# Altium PCB JacdacServoDual 23.PcbDoc (part 1 of 2)
Units mm, origin at the board's own origin, x right, y up, seen from the top; angles counter-clockwise.
Board outline 35 x 26.5 mm, 2 copper layers (Top Layer, Bottom Layer), stack 1.525 mm thick; 38 components, 30 nets, 124 pads, 24 vias.
Unrouted connection lines stored in the file: 10.
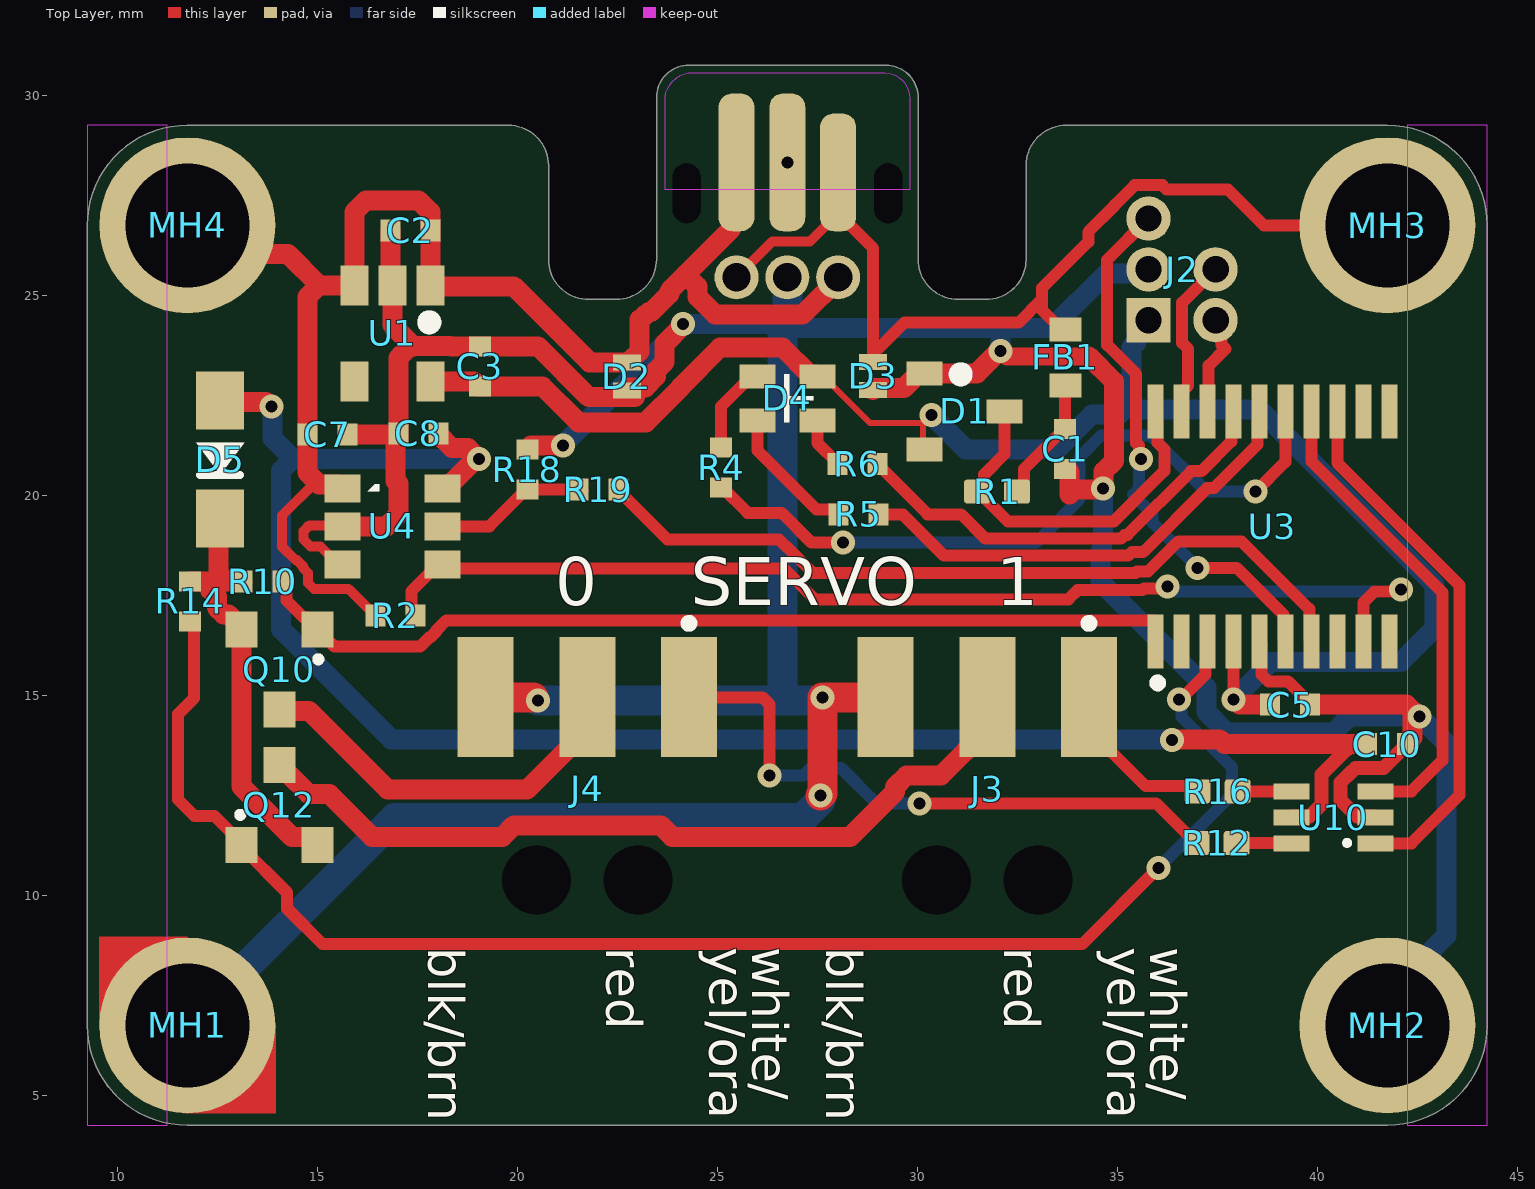
[diagram p0: Top Layer view]
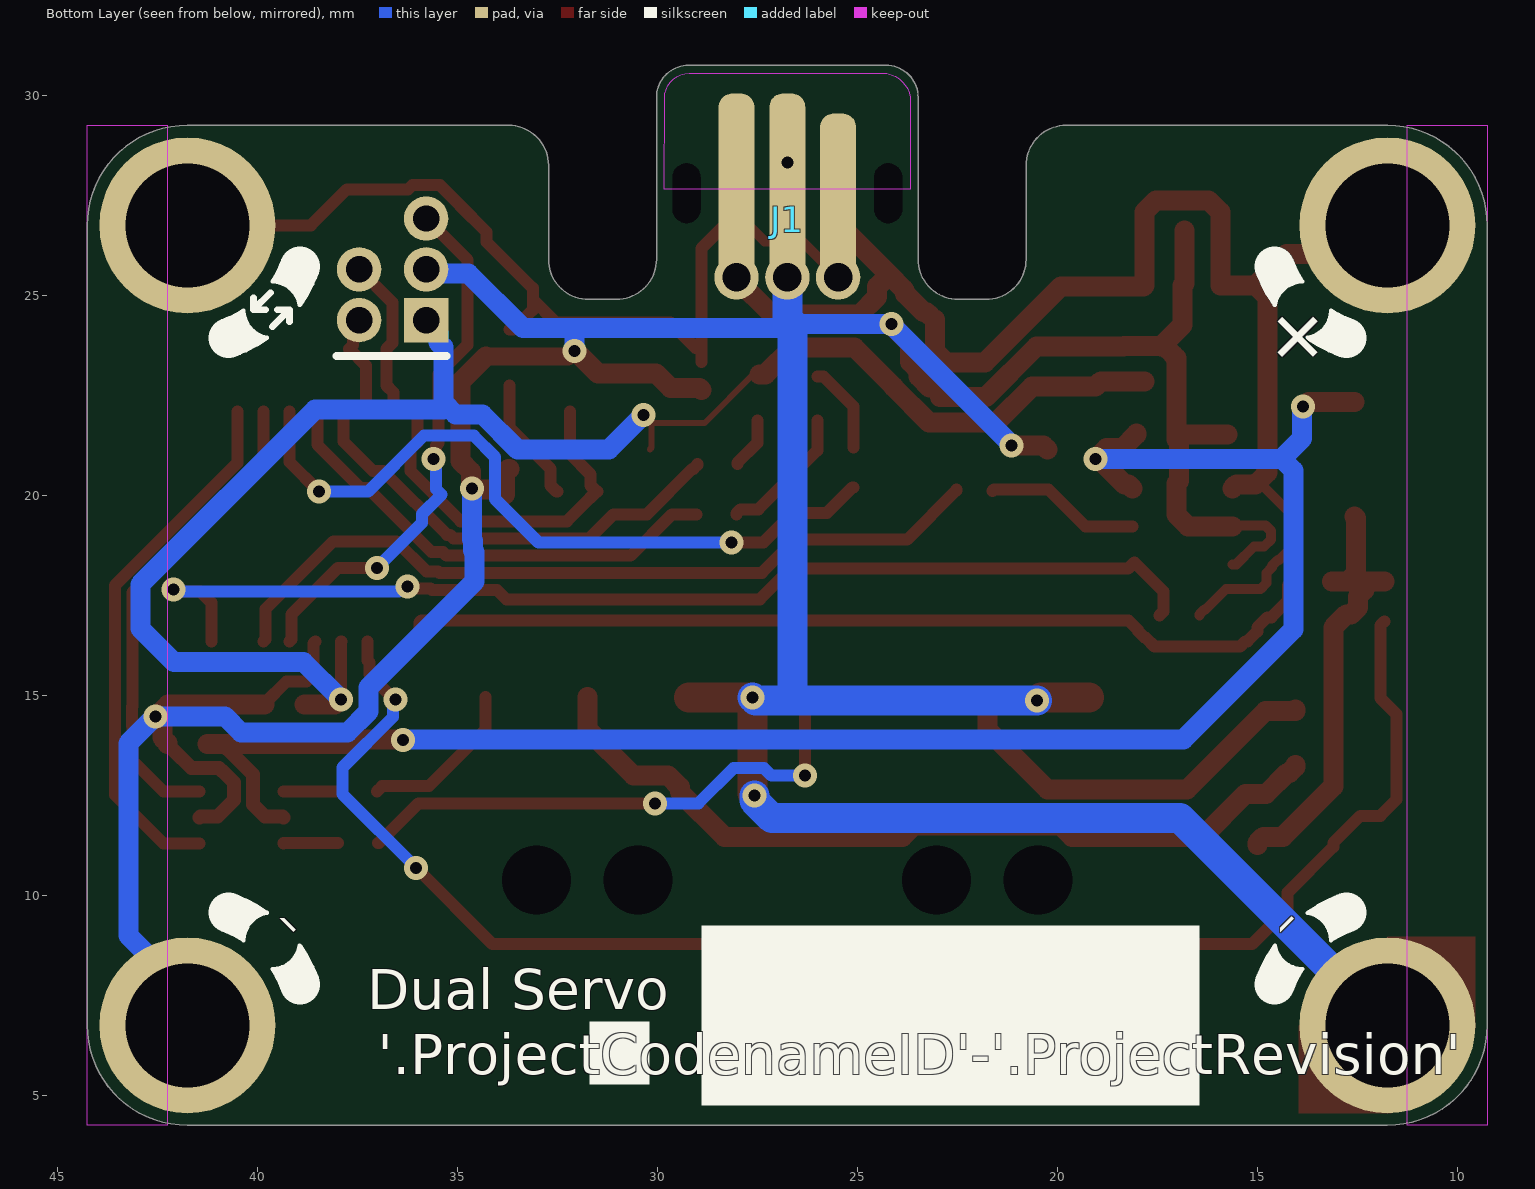
[diagram p1: Bottom Layer view, seen from below]

## Layer stack, top to bottom
Top Solder: solder mask 0.0102, Solder Resist, Dk 3.5
Top Layer: signal copper 0.0356
Dielectric 1: core 1.454, FR-4, Dk 4.2
Bottom Layer: signal copper 0.0356
Bottom Solder: solder mask 0.0102, Solder Resist, Dk 3.5

## Board outline
9.25,6.75 ccw(c11.75,6.75) 11.75,4.25 41.75,4.25 ccw(c41.75,6.75) 44.25,6.75 44.25,26.75 ccw(c41.75,26.75) 41.75,29.25 41.744,29.25 33.72,29.25 ccw(c33.72,28.25) 32.72,28.25 32.72,25.898 cw(c31.72,25.898) 31.72,24.898 31.72,24.9 31.02,24.9 cw(c31.02,25.9) 30.02,25.9 30.02,29.95 ccw(c29.22,29.95) 29.22,30.75 24.28,30.75 ccw(c24.28,29.95) 23.48,29.95 23.48,29.948 23.48,25.898 23.48,25.9 cw(c22.48,25.9) 22.48,24.9 22.51,24.9 21.78,24.9 21.78,24.898 cw(c21.78,25.898) 20.78,25.898 20.78,28.25 ccw(c19.78,28.25) 19.78,29.25 11.744,29.25 11.75,29.25 ccw(c11.75,26.75) 9.25,26.75

## Design rules (kind name [scope] priority, off if disabled: settings)
AssemblyTestPointUsage [All] p1: valid=2
BoardOutlineClearance [All] p1: gap=0.3 ignorepadtopadclearanceinfootprint=FALSE except(0: Arc-SplitContinuation Track-SplitContinuation SMDPad-SplitContinuation THPad-SplitContinuation Via-SplitContinuation Fill-SplitContinuation Poly-SplitContinuation Region-SplitContinuation Text-OutlineEdge Text-SplitContinuation; 0.2: Region-CavityEdge Region-CutoutEdge Region-SplitBarrior Text-CavityEdge Text-CutoutEdge Text-SplitBarrior)
Clearance [All] p1: gap=0.13 ignorepadtopadclearanceinfootprint=FALSE except(0.125: SMDPad-SMDPad; 0.254: Arc-Hole Track-Hole SMDPad-Hole THPad-Hole Via-Hole Fill-Hole Poly-Hole Region-Hole Text-Hole)
ComponentClearance MH5.0KeepoutaAreaClearance [InComponent('MH1') or InComponent('MH2')  or InComponent('MH3') or InComponent('MH4') vs InComponent('D6') or InComponent('D7') or InComponent('D8') or InComponent('D9') or InComponent('D10') or InComponent('D11') or InComponent('D12') or InComponent('D13') or InComponent('C6') or InComponent('C7') or InComponent('C8')  or  InComponent('C9') or  InComponent('C12')] p1: gap=0 collisioncheckmode=3 verticalgap=0 showdistances=FALSE
ComponentClearance [All] p2: gap=0.2 collisioncheckmode=3 verticalgap=0.2 showdistances=FALSE
DiffPairsRouting [All] p1: maxlimit=2 minlimit=0.15 mostfreqgap=0.15 toplayer_minwidth=0.15 toplayer_maxwidth=2 toplayer_prefwidth=0.15 bottomlayer_minwidth=0.15 bottomlayer_maxwidth=2 bottomlayer_prefwidth=0.15 substack1={CB9D278B-8BF5-444A-AAF4-837A2A9DF42D} toplayer_{cb9d278b-8bf5-444a-aaf4-837a2a9df42d}_minwidth=0.381 toplayer_{cb9d278b-8bf5-444a-aaf4-837a2a9df42d}_maxwidth=0.381 toplayer_{cb9d278b-8bf5-444a-aaf4-837a2a9df42d}_prefwidth=0.381 bottomlayer_{cb9d278b-8bf5-444a-aaf4-837a2a9df42d}_minwidth=0.381 bottomlayer_{cb9d278b-8bf5-444a-aaf4-837a2a9df42d}_maxwidth=0.381 bottomlayer_{cb9d278b-8bf5-444a-aaf4-837a2a9df42d}_prefwidth=0.381 substack2={826B8647-A721-4255-895A-19F9591B9CD1} toplayer_{826b8647-a721-4255-895a-19f9591b9cd1}_minwidth=0.381 toplayer_{826b8647-a721-4255-895a-19f9591b9cd1}_maxwidth=0.381 toplayer_{826b8647-a721-4255-895a-19f9591b9cd1}_prefwidth=0.381 bottomlayer_{826b8647-a721-4255-895a-19f9591b9cd1}_minwidth=0.381 bottomlayer_{826b8647-a721-4255-895a-19f9591b9cd1}_maxwidth=0.381 bottomlayer_{826b8647-a721-4255-895a-19f9591b9cd1}_prefwidth=0.381 substack3={E64FCAF4-1BC8-437D-B1E0-0E5F2DC0F59E} toplayer_{e64fcaf4-1bc8-437d-b1e0-0e5f2dc0f59e}_minwidth=0.381 toplayer_{e64fcaf4-1bc8-437d-b1e0-0e5f2dc0f59e}_maxwidth=0.381 toplayer_{e64fcaf4-1bc8-437d-b1e0-0e5f2dc0f59e}_prefwidth=0.381 bottomlayer_{e64fcaf4-1bc8-437d-b1e0-0e5f2dc0f59e}_minwidth=0.381 bottomlayer_{e64fcaf4-1bc8-437d-b1e0-0e5f2dc0f59e}_maxwidth=0.381 bottomlayer_{e64fcaf4-1bc8-437d-b1e0-0e5f2dc0f59e}_prefwidth=0.381 substack4={E61CE66C-507C-4E1E-8E83-C905434AFC1C} toplayer_{e61ce66c-507c-4e1e-8e83-c905434afc1c}_minwidth=0.381 toplayer_{e61ce66c-507c-4e1e-8e83-c905434afc1c}_maxwidth=0.381 toplayer_{e61ce66c-507c-4e1e-8e83-c905434afc1c}_prefwidth=0.381 bottomlayer_{e61ce66c-507c-4e1e-8e83-c905434afc1c}_minwidth=0.381 bottomlayer_{e61ce66c-507c-4e1e-8e83-c905434afc1c}_maxwidth=0.381 bottomlayer_{e61ce66c-507c-4e1e-8e83-c905434afc1c}_prefwidth=0.381 maxuncoupledlength=25
FabricationTestPointUsage [All] p1: valid=2 allowmultiple=FALSE
HoleSize [All] p1: absolutevalues=TRUE maxlimit=5 minlimit=0.2 maxpercent=80.000 minpercent=20.000
HoleToHoleClearance HoleToHoleClearance_J3_J4 [InComponent('J3') vs InComponent('J4')] p1: gap=2.54 allowstackedmicrovias=TRUE
HoleToHoleClearance [All] p2: gap=0.254 allowstackedmicrovias=TRUE
MinimumSolderMaskSliver [All] p1: minsoldermaskwidth=0.005
PlaneClearance [All] p1: clearance=0.3
PlaneConnect [All] p1: planeconnectstyle=Relief reliefexpansion=0.5 reliefentries=4 reliefconductorwidth=0.2 reliefairgap=0.3
PolygonConnect "PolygonConnect GND" [isVIA] p1: connectstyle=Relief reliefconductorwidth=0.2 reliefentries=4 polygonreliefangle="90 Angle" airgapwidth=0.2
PolygonConnect [All] p2: connectstyle=Relief reliefconductorwidth=0.2 reliefentries=4 polygonreliefangle="90 Angle" airgapwidth=0.2
RoutingVias [All] p1: holewidth=0.3 width=0.6 viastyle="Through Hole" minholewidth=0.3 minwidth=0.6 maxholewidth=0.3 maxwidth=0.8
SilkToSilkClearance [All] p1: silktosilkclearance=0.001
SilkToSolderMaskClearance [IsPad] p1: minsilkscreentomaskgap=0.05 clearancetoexposedcopper=TRUE
SolderMaskExpansion [All] p1: expansion=0.075 istentingtop=FALSE
UnRoutedNet [All] p1: checkbadconnections=TRUE
ViasUnderSMD [not (HasFootprint('JACDAC_EDGE_CONNECTOR_NO_TRACES'))] p1: allowed=FALSE
Width [All] p1: maxlimit=2 minlimit=0.15 preferedwidth=0.15 substack1={CB9D278B-8BF5-444A-AAF4-837A2A9DF42D} substack2={826B8647-A721-4255-895A-19F9591B9CD1} substack3={E64FCAF4-1BC8-437D-B1E0-0E5F2DC0F59E} substack4={E61CE66C-507C-4E1E-8E83-C905434AFC1C} minimp=50.000000 maximp=50.000000 favimp=50.000000
18 further rules are at their usual default settings.

## Components (designator, comment, footprint, x,y, rotation, side; value= is the part's Value field where it differs from the comment)
C1 "CL05C330JB5NNNC" "C0402_0.55MM - without outline" 33.695,21.163 r90 top
C2 "CL05A105KP5NNNC" "C0402_0.55MM - without outline" 17.325,26.625 r0 top
C3 "CL05A105KP5NNNC" "C0402_0.55MM - without outline" 19.065,23.222 r270 top
C5 "CL05A105KP5NNNC" "C0402_0.55MM - without outline" 39.322,14.769 r180 top
C7 "CL05A475MP5NRNC" "R0402 - Without outline" 15.25,21.525 r180 top
C8 "CL05A475MP5NRNC" "R0402 - Without outline" 17.525,21.55 r0 top
C10 "CL05A105KP5NNNC" "C0402_0.55MM - without outline" 41.744,13.782 r180 top
D1 "BAT54S" "NXP-BAT54S-TO-236AB - without outline" 31.185,22.1 r0 top
D2 "RCLAMP0521P-N" "TVS 0402 - L" 22.736,22.977 r270 top
D3 "RCLAMP0521P-N" "TVS 0402 - L" 28.894,22.986 r270 top
D4 "HSMF-C114" HSMF-C114 26.75,22.425 r180 top
D5 "MBR120VLSFT3G" MBR120VLSFT3G 12.57,20.895 r90 top
FB1 "TDK MPZ1608S102ATA00" "TDK MPZ1608 0.8mm - without outline" 33.7,23.45 r270 top
J1 "3 pin JACDAC edge connector" JACDAC_EDGE_CONNECTOR_NO_TRACES 26.75,24.9 r180 bottom
J2 "Hack Connect Mini 1.27 mm pitch 2-row" HACK_CONNECT_MINI_5_X_1_27 35.779,24.38 r0 top
J3 "TSM-103-01-L-SH-A" TSM-103-01-L-SH-A 31.75,12.666 r0 top
J4 "TSM-103-01-L-SH-A" TSM-103-01-L-SH-A 21.75,12.666 r0 top
MH1 "MH_7.0MMK_4.4MMC_3.1MMD_PTH" MH_7.0MMK_4.4MMC_3.1MMD_PTH 11.75,6.75 r0 top
MH2 "MH_7.0MMK_4.4MMC_3.1MMD_PTH" MH_7.0MMK_4.4MMC_3.1MMD_PTH 41.75,6.75 r0 top
MH3 "MH_7.0MMK_4.4MMC_3.1MMD_PTH" MH_7.0MMK_4.4MMC_3.1MMD_PTH 41.75,26.75 r0 top
MH4 "MH_7.0MMK_4.4MMC_3.1MMD_PTH" MH_7.0MMK_4.4MMC_3.1MMD_PTH 11.75,26.75 r0 top
Q10 "MOSFET P-CH 20V 4.2A SOT23" DIODES-SOT23-3 14.05,15.65 r270 top
Q12 "MOSFET P-CH 20V 4.2A SOT23" DIODES-SOT23-3 14.05,12.264 r90 top
R1 "RC0402FR-07220RL" RES0402 31.995,20.095 r0 top
R2 "RC0402FR-071ML" "R0402 - Without outline" 16.95,16.997 r0 top
R4 "RC0402FR-0730RL" "R0402 - Without outline" 25.097,20.694 r270 top
R5 "RC0402FR-0730RL" "R0402 - Without outline" 28.526,19.525 r0 top
R6 "RC0402FR-07150RL" "R0402 - Without outline" 28.499,20.785 r0 top
R10 "RC0402FR-071ML" "R0402 - Without outline" 13.632,17.85 r180 top
R12 "RC0402FR-071KL" RES0402 37.484,11.311 r180 top
R14 "RC0402FR-071ML" "R0402 - Without outline" 11.823,17.35 r90 top
R16 "RC0402FR-071KL" RES0402 37.51,12.6 r180 top
R18 "RC0402FR-0762KL" "R0402 - Without outline" 20.25,20.65 r270 top
R19 "RC0402FR-0762KL" "R0402 - Without outline" 22.025,20.15 r180 top
U1 "ME6211C33M5G-N" MICRONE-SOT23-5 16.875,24.05 r270 top
U3 "" 20-TSSOP 38.875,19.225 r90 top
U4 "AP22652W6-7" SOT-26 16.875,19.225 r0 top
U10 "74HCT2G17GW,125" 6TSSOP_SOT457 40.4,11.95 r180 top

## Footprints (in the part's own frame and the unit in brackets; to place one, negate y for a bottom-side part, rotate by r counter-clockwise, add the part's x,y. Pads: shape width x height; smd on the part's side, far side on the other; paste and mask are expansions set on the pad)
6TSSOP_SOT457 [mm] "IC BUF NON-INVERT 5.5V 6TSSOP"
  rect 0.9x0.4 smd: 1(-1.05,0.65) 2(-1.05,0) 3(-1.05,-0.65) 4(1.05,-0.65) 5(1.05,0) 6(1.05,0.65)
  silkscreen extent -0.39,0.59 -0.29,0.69, body extent -1.05,-1 1.05,1, height 1.1
20-TSSOP [mm] "0.173\", 4.40mm Width"
  rect 1.35x0.4 smd: 1(-2.875,2.925) 2(-2.875,2.275) 3(-2.875,1.625) 4(-2.875,0.975) 5(-2.875,0.325) 6(-2.875,-0.325) 7(-2.875,-0.975) 8(-2.875,-1.625) 9(-2.875,-2.275) 10(-2.875,-2.925) 11(2.875,-2.925) 12(2.875,-2.275) 13(2.875,-1.625) 14(2.875,-0.975) 15(2.875,-0.325) 16(2.875,0.325) 17(2.875,0.975) 18(2.875,1.625) 19(2.875,2.275) 20(2.875,2.925)
  silkscreen extent -4,2.78 -3.83,2.95, body extent -3.3,-3.3 3.3,3.3, height 1.2
"C0402_0.55MM - without outline" [mm]
  rect 0.5x0.55 smd: 1(-0.5,0) 2(0.5,0)
  body extent -0.5,-0.25 0.5,0.25, height 0.55
DIODES-SOT23-3 [mm] "SOT23, 3-Leads, Body 2.90x2.45mm, Pitch 0.95mm, IPC Medium Density"
  rect 0.9x0.8 smd: 1(-1,0.95) 2(-1,-0.95) 3(1,0)
  silkscreen extent -0.3,0.93 -0.2,1.02, body extent -1.27,-1.5 1.23,1.5, height 1.1
HACK_CONNECT_MINI_5_X_1_27 [mm] "5 pins, 1.27mm x 1.676mm pitch"
  rect 1.11x1.11 hole 0.66: 1(0,0)
  round 1.11 hole 0.66: 2(1.676,0) 3(0,1.27) 4(1.676,1.27) 5(0,2.54)
HSMF-C114 [mm] "LED RGB DIFFUSED CHIP SMD"
  rect 0.9x0.6 smd mask+0.05: 1(-0.75,-0.55) 2(-0.75,0.55) 3(0.75,0.55) 4(0.75,-0.55)
  silkscreen extent -0.65,-0.6 0.07,0.6, body extent -0.8,-0.75 0.8,0.75, height 0.55
JACDAC_EDGE_CONNECTOR_NO_TRACES [mm] "JacDac 3 pin connector with no traces"
  rrect78% 0.9x2.95 smd far side paste-1 mask+0: 1(-1.27,3.175)
  round 1.11 / inner round 0.71 / far side round 1.1 hole 0.71 paste-0.254 mask+0: 1(1.27,0.55) 2(0,0.55) 3(-1.27,0.55)
  rrect78% 0.9x4.3 smd paste-1 mask+0: 1(1.27,2.5)
  rrect78% 0.9x4.8 smd paste-1 mask+0: 2(0,2.75) 3(-1.27,2.75)
  rrect78% 0.9x3.45 smd far side paste-1 mask+0: 2(0,3.425) 3(1.27,3.425)
  round 0 hole 0.7 slot 1.5 at 90 deg unplated: ""(-2.52,2.65) ""(2.52,2.65)
  Top Layer keep-out region: -3.075,2.75 -3.07,5.033 -2.987,5.341 -2.761,5.567 -2.453,5.65 -2.453,5.65 2.27,5.65 2.545,5.635 2.794,5.516 2.978,5.31 3.07,5.05 3.07,5.05 3.07,2.75
  Bottom Layer keep-out region: -3.07,2.75 -3.07,5.033 -3.023,5.269 -2.889,5.469 -2.689,5.603 -2.453,5.65 -2.453,5.65 2.27,5.65 2.545,5.635 2.794,5.516 2.978,5.31 3.07,5.05 3.07,5.05 3.07,2.75
MBR120VLSFT3G [mm] "SODFL, 2-Leads, Body 1.65x3.60mm, IPC Medium Density"
  rect 1.45x1.2 smd: 1(-1.475,0) 2(1.475,0)
  silkscreen extent -0.38,-0.6 0.42,0.6, body extent -1.73,-0.82 1.72,0.82, height 0.95
MH_7.0MMK_4.4MMC_3.1MMD_PTH [mm] "Jacdac mounting hole 7.0mm clearance, 4.4 annualar ring and 3.1mm PTH"
  round 4.4 hole 3.1 mask+0.05: 1(0,0)
MICRONE-SOT23-5 [mm]
  rect 1x0.7 smd: 1(-1.2,0.95) 2(-1.2,0) 3(-1.2,-0.95) 4(1.2,-0.95) 5(1.2,0.95)
  silkscreen extent -0.32,0.88 -0.23,0.97, body extent -1.32,-1.5 1.32,1.5, height 1.11
"NXP-BAT54S-TO-236AB - without outline" [mm] "SOT23, 3-Leads, Body 2.90x2.30mm, Pitch 0.95mm, IPC Medium Density"
  rect 0.9x0.6 smd: 1(-1,0.95) 2(-1,-0.95) 3(1,0)
  silkscreen extent -0.15,0.88 -0.05,0.97, body extent -1.32,-1.5 1.32,1.5, height 1.12
"R0402 - Without outline" [mm]
  rect 0.5x0.55 smd: 1(-0.5,0) 2(0.5,0)
  body extent -0.5,-0.25 0.5,0.25, height 0.35
RES0402 [mm] "Chip Resistor 0402"
  rrect25% 0.65x0.6 smd: 1(-0.5,0) 2(0.5,0)
  body extent -0.53,-0.28 0.53,0.27, height 0.35
SOT-26 [mm] "LOAD SWITCH SOT26"
  rrect0% 0.9x0.7 smd mask+0.05: 1(-1.25,0.95) 2(-1.25,0) 3(-1.25,-0.95) 4(1.25,-0.95) 5(1.25,0) 6(1.25,0.95)
  silkscreen extent -0.62,0.87 -0.33,1.05, body extent -1.52,-1.52 1.53,1.53, height 1.1
"TDK MPZ1608 0.8mm - without outline" [mm]
  rect 0.6x0.8 smd: 1(-0.7,0) 2(0.7,0)
  body extent -0.8,-0.4 0.8,0.4, height 0.8
TSM-103-01-L-SH-A [mil]
  rect 55.12x118.11 smd: 1(100,90) 2(0,90) 3(-100,90)
  round 60 hole 68.11: 5(50,-90) 6(-50,-90)
  silkscreen extent 96,159 104,167, body extent -150,-370 150,140, height 120
"TVS 0402 - L" [mm] "TVS 0402 RoHS"
  rect 0.4x0.7 smd paste-0.038 mask+0.05: 1(-0.35,0) 2(0.35,0)
  body extent -0.5,-0.3 0.5,0.3, height 0.5

## Part data
C1: "CAP CER 33PF 50V C0G/NP0 0402", Capacitance=33pF, Case Code (Imperial)=0402, Case Code (Metric)=1005, Dielectric=C0G, Manufacturer=Samsung, Max Operating Temperature=125°C, Min Operating Temperature=-55°C, Package Quantity=1, Supplier Part Number 1=1276-1272-1-ND, Temperature Coefficient=300ppm/°C, Tolerance=5%, Voltage=50V, Case/Package=0402, Category="Ceramic Capacitors", ComponentLink1Description="Online datasheet", ComponentLink1URL=https://datasheet.ciiva.com/15195/getdatasheetpartid-355282-15195687.pdf, Construction=Flat, Contact Plating=Tin, Depth=0.5mm, Height=0.5mm, Lead Free="Lead Free", Length=1mm, Manufacturer Part Number=CL05C330JB5NNNC, Material=Ceramic, Mount="Surface Mount", Packaging="Tape and Reel", Pricing 1="1=0.10000, 10=0.02300, 50=0.01260, 100=0.01040, 500=0.00740, 1000=0.00582, 2500=0.00529, 5000=0.00487 (USD)", Pricing 2="1=0.12500, 25=0.02900, 100=0.01300, 250=0.01100, 500=0.00900, 1000=0.00600 (USD)", Pricing 3="1=0.10000, 10=0.01400, 50=0.01400, 100=0.01100, 1000=0.00600, 10000=0.00400 (USD)", Pricing 4="150=0.01120, 500=0.00860, 2500=0.00640, 5000=0.00550 (GBP)", Radiation Hardening=No, RoHS=Yes, RoHS Compliant=Yes, Series=CL, Stock 1=5436088, Stock 2=45340, Stock 3=8877, Stock 4=10934, Supplier 1=Digi-Key, Supplier 2=Newark, Supplier 3=Mouser, Supplier 4=Farnell, Supplier Part Number 2=82AC9259, Supplier Part Number 3=187-CL05C330JB5NNNC, Supplier Part Number 4=3013373RL, Thickness=0.022inch, Voltage Rating=50V, Voltage Rating (DC)=50V, Width=0.02inch
C2 C3 C5 C10: "CAP CER 1UF 10V X5R 0402", Capacitance=1µF, Case Code (Imperial)=0402, Case Code (Metric)=1005, Dielectric=X5R, Manufacturer=Samsung, Max Operating Temperature=85°C, Min Operating Temperature=-55°C, Package Quantity=1, Supplier Part Number 1=1276-1076-1-ND, Tolerance=10%, Voltage Rating=10V, Case/Package=0402, Category=Capacitors, Checked=?, ComponentLink1Description="Online datasheet", ComponentLink1URL=https://datasheet.ciiva.com/15195/getdatasheetpartid-358390-15195630.pdf, Contact Plating=Tin, Created=DG, Depth=0.5mm, Height=0.5mm, Length=1mm, Manufacturer Part Number=CL05A105KP5NNNC, Material=Ceramic, Mount="Surface Mount", Packaging="Tape and Reel", Pricing 1="1=0.10000, 10=0.03900, 50=0.02100, 100=0.01720, 500=0.01228, 1000=0.00965, 2500=0.00877, 5000=0.00807 (USD)", Pricing 2="1=0.10000, 10=0.04200, 100=0.01800, 500=0.01300, 1000=0.01000, 2500=0.00900 (USD)", Pricing 3="10=0.02450, 100=0.02000, 500=0.01310, 2500=0.00920, 5000=0.00810, 10000=0.00640, 50000=0.00490 (GBP)", Radiation Hardening=No, RoHS=Yes, Stock 1=5705569, Stock 2=928941, Stock 3=53670, Supplier 1=Digi-Key, Supplier 2=Mouser, Supplier 3=Farnell, Supplier Part Number 2=187-CL05A105KP5NNNC, Supplier Part Number 3=3013329, Thickness=0.022inch, Width=0.02inch
C7 C8: "CAP CER 4.7UF 10V X5R 0402", Capacitance=4.7uF, Case Code (Imperial)=0402, Case Code (Metric)=1005, Dielectric=X5R, Manufacturer=Samsung, Max Operating Temperature=85°C, Min Operating Temperature=-55°C, Package Quantity=10000, Supplier Part Number 1=1276-1482-2-ND, Tolerance=20%, Voltage Rating=10V, Case/Package=0402, Category="Ceramic Capacitors", Checked By=?, ComponentLink1Description="Online datasheet", ComponentLink1URL=https://datasheet.ciiva.com/25786/cl05a475mp5nrnc-25786963.pdf, Created By="D. Gakure", Lead Free="Lead Free", Length=0.039inch, Manufacturer Part Number=CL05A475MP5NRNC, Mount="Surface Mount", Packaging="Tape and Reel", Pricing 1="10000=0.01405, 20000=0.01338 (USD)", Pricing 2="1=0.23500, 500=0.03970, 1500=0.02900, 2500=0.02500, 5000=0.02050 (USD)", RoHS=Yes, RoHS Compliant=Yes, Series=CL, Stock 1=840000, Stock 2=2004, Supplier 1=Digi-Key, Supplier 2="Future Electronics", Supplier Part Number 2=2103694, Thickness=0.022inch, Width=0.02inch
D1: "DIODE ARRAY SCHOTTKY 30V SOT23", Manufacturer=Nexperia, Manufacturer Part Number=BAT54S,235, Supplier Part Number 1=1727-1868-1-ND, Category="Rectifier Diodes", ComponentLink1Description="NXP datasheet online", ComponentLink1URL=https://assets.nexperia.com/documents/data-sheet/BAT54_SER.pdf, Generic Part Number=BAT54S, Pricing 1="1=0.13000, 10=0.11900, 100=0.05610, 500=0.03326, 1000=0.02185, 5000=0.02138 (USD)", RoHS=No, Stock 1=14011, Supplier 1=Digi-Key, Supplier 2=Mouser, Supplier 3=RSComponents, Supplier Part Number 2=771-BAT54S235, Supplier Part Number 3=1707990
D2 D3: "Bidirectional 5V (Max) 6V 16V 3.5A (8/20us) 0402 TVS RoHS", Manufacturer="Born Semiconductor", Package=0402, Supplier1 Part Number=C316043, Checked By=?, ComponentLink1Description="Online datasheet", ComponentLink1URL=https://datasheet.lcsc.com/szlcsc/Bourne-Semicon-Shenzhen-RCLAMP0521P-N_C316043.pdf, Created By="D Gakure", Manufacturer Part Number=RCLAMP0521P-N, Supplier1=LCSC
D4: "Red, Green, Blue (RGB) 626nm Red, 525nm Green, 470nm Blue LED Indication - Discrete 1.9V Red, 3.4V Green, 3.4V Blue 0606 (1616 Metric)", Case Code (Imperial)=0606, Case Code (Metric)=1616, Color=Blue,Green,Red, Forward Current=20mA, Forward Voltage=3.4V, Lens Color=White, Manufacturer="Broadcom Avago", Max Operating Temperature=85°C, Min Operating Temperature=-40°C, Package Quantity=4000, Power Rating=78mW, Reverse Voltage=5V, Supplier Part Number 1=516-1795-1-ND, Supplier Part Number 10=?, Case/Package=0606, Category=Optoelectronics, Checked By=?, ComponentLink1Description="Online datasheet", ComponentLink1URL=https://docs.broadcom.com/docs/AV02-2451EN, Created By="D. Gakure", Depth=1.6mm, Dominant Wavelength=470nm, Height=0.35mm, Lead Free="Lead Free", Length=1.6mm, Lens Style=Diffused,Rectangular, Lens Transparency=Diffused, Luminous Intensity=70mcd, Manufacturer Part Number=HSMF-C114, Mount="Surface Mount", Number of Elements=3, Number of LEDs=3, Number of Pins=4, Packaging="Tape and Reel", Pricing 1="1=1.78000, 10=1.12500, 100=0.83250, 500=0.76500, 1000=0.63000, 2000=0.59850 (USD)", Pricing 2="1=1.56000, 10=0.97100, 25=0.87800, 50=0.78500, 100=0.69200, 500=0.60500 (GBP)", Pricing 3="1=1.69000, 10=1.13000, 50=1.13000, 100=0.85600, 1000=0.74800, 10000=0.74800 (USD)", Radiation Hardening=No, REACH SVHC="No SVHC", RoHS=Yes, Stock 1=20555, Stock 2=8134, Stock 3=14991, Supplier 1=Digi-Key, Supplier 2=Farnell, Supplier 3=Mouser, Supplier Part Number 2=1058362, Supplier Part Number 3=630-HSMF-C114, Test Current=20mA, Viewing Angle=145°, Wavelength=470nm, Width=1.5mm
D5: "DIODE SCHOTTKY 20V 1A SOD123FL", Average Rectified Current=1A, Forward Voltage=340mV, Generic Part Number="(see BOM)", Manufacturer="ON Semiconductor", Max Forward Surge Current (Ifsm)=45A, Max Operating Temperature=125°C, Max Repetitive Reverse Voltage (Vrrm)=20V, Max Reverse Leakage Current=600uA, Min Operating Temperature=-65°C, Package Quantity=10000, Supplier Part Number 1=MBR120VLSFT3GOSCT-ND, Category="Schottky Diodes", ComponentLink4Description="On Semi datasheet online", ComponentLink4URL=https://datasheet.ciiva.com/6380/mbr120vlsft1-d-6380910.pdf, Current Rating=1A, Element Configuration=Single, Forward Current=1A, Halogen Free="Halogen Free", Lead Free="Lead Free", Manufacturer Part Number=MBR120VLSFT3G, Max Reverse Voltage (DC)=20V, Max Surge Current=45A, Number of Pins=2, Output Current=1A, Packaging="Tape and Reel", Peak Non-Repetitive Surge Current=45A, Peak Reverse Current=600uA, Polarity=Standard, Pricing 1="1=0.39000, 10=0.28600, 100=0.19920, 500=0.12616, 1000=0.10292, 2000=0.09960, 5000=0.09628 (USD)", Radiation Hardening=No, REACH SVHC="No SVHC", RoHS=Yes, Stock 1=32481, Supplier 1=Digi-Key, Supplier 2=Mouser, Supplier 3=RSComponents, Supplier Part Number 2=863-MBR120VLSFT3G, Supplier Part Number 3=1867479, Voltage Rating (DC)=20V
FB1: "0603 1k@100MHz 0.8A chip", Case Code (Imperial)=0603, Case Code (Metric)=1608, Current Rating=800mA, DC Resistance (DCR)=300mR, Manufacturer=TDK, Manufacturer Part Number=MPZ1608S102ATA00, Package Quantity=4000, Supplier Part Number 1=445-8694-1-ND, Tolerance=25%, Case/Package=0603, ComponentLink2Description="datasheet online", ComponentLink2URL=https://www.mouser.co.uk/datasheet/2/400/eads_commercial_power_mpz1608_en-923650.pdf, ComponentLink3Description=datasheet, ComponentLink3URL="Y:\System\Altium\Libraries 2014\TDK\Datasheets\eads_commercial_power_mpz1608_en-923650.pdf", Core Material=Ferrite, Height=0.037inch, Impedance="1kR @ 100MHz", Length=0.063inch, Max DC Current=800mA, Mount="Surface Mount", Packaging="Tape and Reel", Pricing 1="1=0.1, 10=0.079, 25=0.0716, 50=0.0644, 100=0.0472, 250=0.03432, 500=0.03146, 1000=0.02717 (USD)", Stock 1=113542, Supplier 1=Digi-Key, Supplier 2=Mouser, Supplier Part Number 2=810-MPZ1608S102ATA00, Width=0.031inch
J1: library part "Jacdac edge connector", "3 pin Jacdac edge connector 1.27mm pitch", Manufacturer Part Number=JACDAC_EDGE_CONNECTOR, Checked By=?, ComponentLink1Description="Yuliang JACDAC cable connector drawing online", ComponentLink1URL=https://github.com/microsoft/jacdac-mdk/blob/main/connector/JACDAC-Connector-by-Yuliang-2020-11-28.pdf, ComponentLink2Description="JACDAC PCB edge connector spec onlin", ComponentLink2URL=https://github.com/microsoft/jacdac-mdk/blob/main/connector/JACDAC_PCB_Edge_Connector_Drawing_JD-PEC-01_rev_01.pdf, Created By="D. Gakure", PCB Type="1.6mm FR4"
J2: library part HACK_CONNECT_MINI
J3 J4: library part TSM-103-01-L-SH-A-whitesch, "SAMTEC         TSM-103-01-L-SH-A             Board-To-Board Connector, TSM Series, 3 Contacts, Header, 2.54 mm, Surface Mount, 1 Rows", Manufacturer=Samtec, Supplier Part Number 1=SAM12221-ND, ComponentLink2Description="part of technical drawing online", ComponentLink2URL=https://datasheet.ciiva.com/25616/0900766b8115801b-25616876.pdf, ComponentLink3Description="part of technical drawing", ComponentLink3URL="Y:\System\Altium\Libraries 2014\Samtec\Datasheets\TSM drawing.pdf", ComponentLink4Description="samtec datasheet", ComponentLink4URL="Y:\System\Altium\Libraries 2014\Samtec\Datasheets\tsm.pdf", ComponentLink5Description="samtec datasheet online", ComponentLink5URL=https://uk.rs-online.com/webdocs/1157/0900766b81157e6c.pdf?src-supplier=RSComponents, Contact Plating=Gold, Gender=Male, Lead Free="Lead Free", Manufacturer Part Number=TSM-103-01-L-SH-A, Number of Contacts=3, Number of Rows=1, Packaging=Bulk, Pitch=2.54mm, Radiation Hardening=No, Supplier 1=Digi-Key, Supplier 2=RSComponents, Supplier 3=Mouser, Supplier Part Number 2=2001543, Supplier Part Number 3=200-TSM10301LSHA, Termination=Solder
MH1 MH2 MH3 MH4: "Mounting Hole 7.0mm keepout, 4.4mm annualar ring and 3.1mm Drill PTH"
Q10 Q12: library part DMG2305UX-whitesch, Case/Package=TO-236-3, Continuous Drain Current (ID)=4.2A, Drain to Source Breakdown Voltage=-20V, Drain to Source Resistance=52mR, Drain to Source Voltage (Vdss)=20V, Gate to Source Voltage (Vgs)=8V, Input Capacitance=808pF, Manufacturer=Diodes, Manufacturer Part Number=DMG2305UX-13, Max Operating Temperature=150°C, Max Power Dissipation=1.4W, Min Operating Temperature=-55°C, On-State Resistance=65MR, Package Quantity=1, Supplier Part Number 1=DMG2305UX-13DICT-ND, Threshold Voltage=-900mV, ComponentLink2Description="online datasheet", ComponentLink2URL=https://datasheet.ciiva.com/18566/dmg2305ux-18566951.pdf, ComponentLink3Description=datasheet, ComponentLink3URL="Y:\System\Altium\Libraries 2014\Diodes Inc\Datasheets\dmg2305ux-30023840.pdf", Element Configuration=Single, Fall Time=34.7ns, Height=1.1mm, Lead Free="Lead Free", Length=3mm, Mount="Surface Mount", Number of Channels=1, Number of Pins=3, Packaging="Tape and Reel", Pricing 1="1=0.44, 10=0.398, 100=0.2228, 500=0.1194, 1000=0.0812 (USD)", Radiation Hardening=No, Rds On Max=52mR, REACH SVHC="No SVHC", Rise Time=13.7ns, Stock 1=131638, Supplier 1=Digi-Key, Supplier 2=Farnell, Supplier 3=Mouser, Supplier 4=RSComponents, Supplier Part Number 2=2543533, Supplier Part Number 3=621-DMG2305UX-7, Supplier Part Number 4=8270452, Turn-Off Delay Time=79.3ns, Turn-On Delay Time=10.8ns, Weight=0.000282oz, Width=1.4mm
R1: "RES SMD 220 OHM 1% 1/16W 0402", Case Code (Imperial)=0402, Case Code (Metric)=1005, Manufacturer=Yageo, Max Operating Temperature=155°C, Max Power Dissipation=63mW, Min Operating Temperature=-55°C, Package Quantity=1, Power Rating=62.5mW, Resistance=220R, Resistor Type="Thick Film", Supplier Part Number 1=311-220LRCT-ND, Temperature Coefficient=100ppm/°C, Tolerance=1%, Voltage Rating=50V, Case/Package=0402, Category=Resistors, Checked=?, ComponentLink1Description="Online datasheet", ComponentLink1URL=https://datasheet.ciiva.com/11819/0900766b80c66297-11819466.pdf, Created=D.G, Depth=0.5mm, Features="Moisture Resistant", Height=0.016inch, Lead Free="Lead Free", Length=1mm, Manufacturer Part Number=RC0402FR-07220RL, Military Standard=Not, Number of Pins=2, Number of Terminations=2, Packaging="Tape and Reel", Pricing 1="1=0.10000, 10=0.01400, 100=0.00580, 1000=0.00262, 2500=0.00228, 5000=0.00188 (USD)", Pricing 2="1=0.10000, 10=0.01200, 100=0.00400, 1000=0.00400, 2500=0.00400, 10000=0.00300 (USD)", Pricing 3="1=0.08130, 25=0.01210, 100=0.01120, 250=0.01030, 500=0.00900 (GBP)", REACH SVHC="No SVHC", RoHS=Yes, Stock 1=1286042, Stock 2=324625, Stock 3=18234, Supplier 1=Digi-Key, Supplier 2=Mouser, Supplier 3=Farnell, Supplier Part Number 2=603-RC0402FR-07220RL, Supplier Part Number 3=2147864, Termination=SMD/SMT, Voltage Rating (DC)=50V, Width=0.02inch
R2 R10 R14: "RES SMD 1M OHM 1% 1/16W 0402", Case Code (Imperial)=0402, Case Code (Metric)=1005, Manufacturer=Yageo, Max Operating Temperature=155°C, Max Power Dissipation=63mW, Min Operating Temperature=-55°C, Resistance=1MR, Resistance Tolerance=1%, Resistor Type="Thick Film", Supplier Part Number 1=311-1.00MLRCT-ND, Temperature Coefficient=100ppm/°C, Voltage Rating=50V, Case/Package=0402, Category="Chip SMD Resistors", Checked By=?, ComponentLink1Description="Online datasheet", ComponentLink1URL=https://datasheet.ciiva.com/11808/0900766b80c66297-11808125.pdf, Construction=Rectangular, Created By="D. Gakure", Depth=0.5mm, Features="Moisture Resistant", Height=0.32mm, Lead Free="Lead Free", Length=1mm, Manufacturer Part Number=RC0402FR-071ML, Military Standard=Not, Number of Terminations=2, Packaging="Tape and Reel", Power Rating=63mW, Pricing 1="1=0.10000, 10=0.01600, 100=0.00640, 1000=0.00286, 2500=0.00248, 5000=0.00205 (USD)", Pricing 2="1=0.10000, 10=0.01200, 50=0.01200, 100=0.00400, 1000=0.00400, 10000=0.00300 (USD)", Pricing 3="10000=0.00290, 50000=0.00200 (GBP)", REACH SVHC=Unknown, RoHS=Yes, RoHS Compliant=Yes, Series=RC, Size Code=0402, Stock 1=7856490, Stock 2=1194490, Stock 3=1530000, Supplier 1=Digi-Key, Supplier 2=Mouser, Supplier 3=Farnell, Supplier Part Number 2=603-RC0402FR-071ML, Supplier Part Number 3=2421892, Technology="THICK FILM", Termination=SMD/SMT, Tolerance=1%
R4 R5: "RES SMD 30 OHM 1% 1/16W 0402", Case Code (Imperial)=0402, Case Code (Metric)=1005, Manufacturer=Yageo, Max Operating Temperature=155°C, Max Power Dissipation=63mW, Min Operating Temperature=-55°C, Resistance=30R, Resistance Tolerance=1%, Resistor Type="Thick Film", Supplier Part Number 1=311-30LRCT-ND, Temperature Coefficient=100ppm/°C, Voltage Rating=50V, Case/Package=0402, Category="Chip SMD Resistors", Checked By=?, ComponentLink1Description="Online datasheet", ComponentLink1URL=https://datasheet.ciiva.com/7849/1018594-7849958.pdf, Construction=Rectangular, Contact Plating=Tin,Matte, Created By="D. Gakure", Depth=0.5mm, Features="Moisture Resistant", Height=0.35mm, Lead Free="Lead Free", Length=1mm, Manufacturer Part Number=RC0402FR-0730RL, Military Standard=Not, Number of Terminations=2, Packaging="Tape and Reel", Power Rating=63mW, Pricing 1="1=0.10000, 10=0.01400, 100=0.00580, 1000=0.00260, 2500=0.00226, 5000=0.00186 (USD)", Pricing 2="1=0.10000, 10=0.01200, 50=0.01200, 100=0.00400, 1000=0.00400, 10000=0.00300 (USD)", Pricing 3="10=0.01210, 100=0.00420, 500=0.00370, 2500=0.00280, 5000=0.00250, 10000=0.00230, 50000=0.00150 (GBP)", REACH SVHC=Unknown, RoHS=Yes, RoHS Compliant=Yes, Series=RC, Size Code=0402, Stock 1=2973, Stock 2=41804, Stock 3=4422, Supplier 1=Digi-Key, Supplier 2=Mouser, Supplier 3=Farnell, Supplier Part Number 2=603-RC0402FR-0730RL, Supplier Part Number 3=1458775, Termination=SMD/SMT, Tolerance=1%, Voltage Rating (DC)=50V, Width=0.5mm
R6: "RES SMD 150 OHM 1% 1/16W 0402", Case Code (Imperial)=0402, Case Code (Metric)=1005, Manufacturer=Yageo, Max Operating Temperature=155°C, Max Power Dissipation=63mW, Min Operating Temperature=-55°C, Package Quantity=1, Power Rating=62.5mW, Resistance=150R, Resistance Tolerance=1%, Resistor Type="Thick Film", Supplier Part Number 1=311-150LRCT-ND, Temperature Coefficient=100ppm/°C, Voltage Rating=50V, Case/Package=0402, Category="Chip SMD Resistors", Checked By=?, ComponentLink1Description="ine datasheet", ComponentLink1URL=https://datasheet.ciiva.com/11808/0900766b80c66297-11808422.pdf, Construction=Rectangular, Created By="D. Gakure", Depth=0.5mm, Features="Moisture Resistant", Height=0.016inch, Lead Free="Lead Free", Length=1mm, Manufacturer Part Number=RC0402FR-07150RL, Military Standard=Not, Number of Terminations=2, Packaging="Tape and Reel", Pricing 1="1=0.10000, 10=0.01400, 100=0.00580, 1000=0.00260, 2500=0.00226, 5000=0.00186 (USD)", Pricing 2="1=0.10000, 10=0.01200, 50=0.01200, 100=0.00400, 1000=0.00400, 10000=0.00300 (USD)", Pricing 3="10000=0.00270, 50000=0.00200 (GBP)", REACH SVHC="No SVHC", RoHS=Yes, RoHS Compliant=Yes, Series=RC, Stock 1=5214533, Stock 2=582717, Stock 3=880000, Supplier 1=Digi-Key, Supplier 2=Mouser, Supplier 3=Farnell, Supplier Part Number 2=603-RC0402FR-07150RL, Supplier Part Number 3=2421893, Technology="THICK FILM", Termination=SMD/SMT, Tolerance=1%, Width=0.02inch, Working Voltage=50V
R12 R16: "RES SMD 1K OHM 1% 1/16W 0402", Case Code (Imperial)=0402, Case Code (Metric)=1005, Manufacturer=Yageo, Max Operating Temperature=155°C, Min Operating Temperature=-55°C, Power Rating=62.5mW, Resistance=1k, Resistor Type="Thick Film", Supplier Part Number 1=311-1.00KLRDKR-ND, Temperature Coefficient=100ppm/°C, Tolerance=1%, Voltage Rating=50V, Case/Package=0402, Category=Resistors, Checked=?, ComponentLink2Description="Online datasheet", ComponentLink2URL=https://datasheet.ciiva.com/12666/pyu-rc0402-51-rohs-l-6-r-12666741.pdf, Created=D.G, Depth=0.5mm, Height=0.32mm, Lead Free="Lead Free", Length=1mm, Manufacturer Part Number=RC0402FR-071KL, Military Standard=Not, Number of Pins=2, Packaging="Tape and Reel", Pricing 1="1=0.10000, 10=0.01400, 100=0.00580, 1000=0.00262, 2500=0.00228, 5000=0.00188 (USD)", Pricing 2="1=0.10000, 10=0.01200, 100=0.00400, 1000=0.00400, 2500=0.00400, 10000=0.00300 (USD)", Pricing 3="1=0.08130, 25=0.01210, 100=0.01120, 250=0.01030, 500=0.00900 (GBP)", REACH SVHC=Unknown, RoHS=Yes, Stock 1=37591306, Stock 2=11912978, Stock 3=29900, Supplier 1=Digi-Key, Supplier 2=Mouser, Supplier 3=Farnell, Supplier Part Number 2=603-RC0402FR-071KL, Supplier Part Number 3=2132441, Termination=SMD/SMT, Voltage Rating (DC)=50V, Width=0.5mm
R18 R19: "RES SMD 62K OHM 1% 1/16W 0402", Case Code (Imperial)=0402, Case Code (Metric)=1005, Manufacturer 1=Yageo, Max Operating Temperature=155°C, Max Power Dissipation=63mW, Min Operating Temperature=-55°C, Resistance=62kR, Resistance Tolerance=1%, Resistor Type="Thick Film", Supplier Part Number 1=311-62.0KLRCT-ND, Temperature Coefficient=100ppm/°C, Voltage Rating=50V, Case/Package=0402, Category="Chip SMD Resistors", ComponentLink1Description="Online datasheet", ComponentLink1URL=https://datasheet.ciiva.com/17068/pyu-rc0402-51-rohs-l-6-r-17068614.pdf, Construction=Rectangular, Depth=0.5mm, Features="Moisture Resistant", Height=0.32mm, Lead Free="Lead Free", Length=1mm, Manufacturer Part Number 1=RC0402FR-0762KL, Military Standard=Not, Number of Terminations=2, Packaging="Tape and Reel", Power Rating=63mW, Pricing 1="1=0.10000, 10=0.01600, 100=0.00660, 1000=0.00299, 2500=0.00259, 5000=0.00214 (USD)", REACH SVHC=Unknown, RoHS=Yes, RoHS Compliant=Yes, Series=RC, Stock 1=306735, Supplier 1=Digi-Key, Supplier 2=Farnell, Supplier 3=RSComponents, Supplier Part Number 2=1458817, Supplier Part Number 3=1987847, Technology="THICK FILM", Termination=SMD/SMT, Tolerance=1%, Voltage Rating (DC)=50V, Working Voltage=50V
U1: "6V 260mV @ 200mA(typ) - - Fixed 3.3V SOT-23-5 Linear Voltage Regulators (LDO) ROHS", Case/Package=SOT-23-5, Dropout Voltage=200mV, Manufacturer="MICRONE(Nanjing Micro One Elec)", Max Input Voltage=6, Min Output Voltage=3.3V, Output Current=500mA, Supplier Part Number=C82942, Category="Voltage Regulators - Linear", Checked=?, ComponentLink3Description="On Semi datasheet online", ComponentLink3URL=https://datasheet.lcsc.com/lcsc/1811131510_MICRONE-Nanjing-Micro-One-Elec-ME6211C33M5G-N_C82942.pdf, Created=DG, Manufacturer Part Number=ME6211C33M5G-N, Mount="Surface Mount", Number of Regulators=1, Output Configuration=Positive, Output Type=Fixed, Pricing 1="1=0.33000, 10=0.24900, 25=0.21760, 100=0.12440, 250=0.11664, 500=0.09330, 1000=0.07153 (USD)", Stock 1=32529, Supplier 1=LCSC
U3: library part STM32G031F6P6, "MCU 32-Bit STM32G031 ARM Cortex-M0+ RISC 32KB Flash 1.7V to 3.6V 20-Pin TSSOP Tube", Generic Part Number="STM32G0 (see BOM)", Manufacturer=STMicroelectronics, Supplier Part Number 1=497-19774-ND, Category=Microcontrollers, Checked By=?, ComponentLink1Description="Online datasheet", ComponentLink1URL=https://www.st.com/resource/en/datasheet/stm32g031c6.pdf, ComponentLink2Description="Online reference manual", ComponentLink2URL=https://www.st.com/resource/en/reference_manual/rm0454-stm32g0x0-advanced-armbased-32bit-mcus-stmicroelectronics.pdf, Created By="D. Gakure", Manufacturer Part Number=STM32G031F6P6, Pricing 1="1=2.39000, 10=2.14400, 25=2.02240, 100=1.72330, 250=1.61808, 500=1.41582, 1000=1.17985 (USD)", Pricing 2="1480=0.78200 (GBP)", RoHS=Yes, Stock 1=166, Supplier 1=Digi-Key, Supplier 2=Farnell, Supplier 3=RSComponents, Supplier Part Number 2=3246918, Supplier Part Number 3=1939834
U4: "USB Power High Side Switch Single 3V to 5.5V 2.1A 6-Pin SOT-26 T/R", Generic Part Number="Current limiter (see BOM)", Manufacturer 1=Diodes, Supplier Part Number 1=31-AP22652W6-7CT-ND, Category="USB Interface ICs", ComponentLink1Description="Online datasheet", ComponentLink1URL=https://www.diodes.com/assets/Datasheets/AP22653Q.pdf, Manufacturer Part Number 1=AP22652W6-7, Pricing 1="1=0.46000, 10=0.39600, 25=0.37000, 100=0.29590, 250=0.27476, 500=0.23250, 1000=0.17966 (USD)", RoHS=Yes, Stock 1=93090, Supplier 1=Digi-Key, Supplier 2=Mouser, Supplier Part Number 2=621-AP22652W6-7
U10: "74HCT2G17 Series 5.5 V 4 mA Dual Non-Inverting Schmitt Trigger - TSSOP-6", Manufacturer 1=Nexperia, Supplier Part Number 1=1727-6931-1-ND, Category="Logic Gates", ComponentLink1Description="Online datasheet", ComponentLink1URL=https://assets.nexperia.com/documents/data-sheet/74LVC2G17.pdf, ComponentLink2Description=https://assets.nexperia.com/documents/data-sheet/74HC_HCT2G17.pdf?src-supplier=Digi-Key, ComponentLink2URL=https://assets.nexperia.com/documents/data-sheet/74HC_HCT2G17.pdf?src-supplier=Digi-Key, Manufacturer Part Number 1=74HCT2G17GW,125, Pricing 1="1=0.46000, 10=0.34900, 25=0.31440, 100=0.21710, 250=0.18284, 500=0.14854, 1000=0.11427 (USD)", RoHS=Yes, RoHS Compliant=Yes, Supplier 1=Digi-Key, Supplier 2=Farnell, Supplier 3=Mouser, Supplier Part Number 2=2777768, Supplier Part Number 3=771-HCT2G17GW125

## Via types
v1: diameter 0.6, hole 0.3, Top Layer to Bottom Layer, tented both sides, 24 vias

## Nets (pads, with @x,y where several pads share a name; then routed paths per layer and width w, separated by ;. In a path a pad name is that pad's centre, name@x,y a point inside that pad or via, vN(x,y) a via of type N, cw(c..) or ccw(c..) an arc to the next point about the centre after c; other vN are vias at no path point)
3V3: C3.2 C5.2 D1.2 D4.1 J2.1 U1.5 U3.4 | length 42
  Top Layer w0.15: D4.1@27.45,23.025 27.6,23.025 28.822,21.803 v1@30.144,21.803 ; D1.2 30.144,21.191 v1@30.144,21.803 ; v1(30.35,22.01) v1@30.144,21.803
  Top Layer w0.3: U3.4 37.903,16.348 37.903,14.892 v1(37.905,14.889)
  Top Layer w0.5: U1.5 18.912,22.85 C3.2@19.04,22.722 ; C3.2 C3.2@19.04,22.722 ; D4.1@27.45,23.025 27.3,23.025 26.631,23.694 25.068,23.694 24.096,22.722 24.096,22.708 23.213,21.825 21.527,21.825 20.63,22.722 C3.2@19.04,22.722 ; v1(37.905,14.889) 37.932,14.889 38.052,14.769 C5.2
  Bottom Layer w0.5: v1(30.35,22.01) 31.208,21.152 33.502,21.152 34.37,22.02 35.046,22.02 35.351,22.325 35.351,23.702 35.474,23.825 35.474,24.075 J2.1 ; 35.351,22.141 38.558,22.141 42.925,17.774 42.925,16.673 42.086,15.834 38.844,15.834 37.905,14.894 v1(37.905,14.889)
\S\E\R\V\O\0\_\E\N\: Q10.1 R10.1 U3.1 | length 23.6
  Top Layer w0.3: R10.1 14.232,17.75 14.232,17.368 14.65,16.95 14.75,16.95 15,16.7 15,16.6 15.25,16.35 15.3,16.35 15.428,16.222 17.572,16.222 17.792,16.442 17.816,16.442 17.98,16.606 17.98,16.63 18.225,16.875 35.9,16.875 35.95,16.825 U3.1
\S\E\R\V\O\1\_\E\N\: Q12.1 R14.1 U3.3 | length 39
  Top Layer w0.3: R14.1 11.923,16.75 11.923,14.933 11.523,14.533 11.523,12.391 11.926,11.988 12.426,11.988 13.1,11.314 13.1,11.214 14.242,10.072 14.242,9.672 15.134,8.78 34.121,8.78 v1(36.029,10.689) ; v1(36.545,14.889) 36.572,14.889 37.2,15.518 37.2,15.825 37.25,15.875 U3.3
  Bottom Layer w0.3: v1(36.029,10.689) 37.871,12.53 37.871,13.195 36.602,14.464 36.602,14.832 v1(36.545,14.889)
\S\E\R\V\O\_\F\A\U\L\T\: R2.2 U3.9 U4.4 | length 28.3
  Top Layer w0.3: R2.2 17.35,17.097 17.35,17.6 18.075,18.325 18.232,18.168 26.671,18.168 27.439,17.4 33.776,17.4 34.006,17.63 35.628,17.63 35.665,17.667 36.193,17.667 v1(36.25,17.725) ; U3.9 41.15,17.318 41.425,17.593 42.037,17.593 v1(42.091,17.646)
  Bottom Layer w0.3: v1(36.25,17.725) 36.331,17.725 36.463,17.593 42.037,17.593 v1(42.091,17.646)
GND: C1.1 C2.1 C3.1 C5.1 C7.1 C8.1 C10.1 D1.1 D2.2 D3.2 J1.2 J2.3 J3.3 J4.3 MH1.1 MH2.1 R18.1 U1.2 U3.5 U4.2 U4.3 U10.2 | length 122.3
  Top Layer w0.25: U4.3 15.525,18.275 15.08,18.72 14.83,18.72 14.654,18.896 14.654,19.104 14.8,19.25 15.6,19.25 U4.2
  Top Layer w0.3: U3.5 38.6,16.3 38.6,15.525 38.776,15.349 39.266,15.349 39.822,14.794 C5.1
  Top Layer w0.35: U10.2 41.425,11.975 40.994,11.975 40.585,12.384 40.585,12.816 40.874,13.105 40.881,13.105 40.958,13.182 41.649,13.182 42.094,13.627 C10.1@42.094,13.632
  Top Layer w0.45: v1@32.239,23.475 34.284,23.475
  Top Layer w0.5: U4.2 16.732,19.225 17.025,19.518 17.025,20.291 16.954,20.362 16.954,21.319 17.025,21.39 C8.1@17.025,21.525 ; C7.1 C8.1@17.025,21.525 ; C2.1 16.825,25.3 U1.2 16.875,24.254 17.404,23.725 17.32,23.725 ; R18.1 20.344,21.244 v1(21.146,21.244) ; v1@20.407,14.948 20.486,14.869 v1(20.514,14.869) ; D2.2@22.736,22.702 23.198,22.702 23.466,22.969 23.466,23.116 23.682,23.332 23.682,23.792 24.141,24.25 v1(24.141,24.277) ; D2.2@22.938,22.455 21.788,22.455 20.521,23.722 18.34,23.722 18.332,23.73 17.325,23.73 17.32,23.726 17.313,23.726 17.095,23.507 17.095,23.5 17.025,23.43 C8.1@17.025,21.525 ; D3.2 28.944,22.686 29.671,22.686 30.035,23.05 31.487,23.05 v1@32.048,23.611 ; J3.3@29.205,14.948 J3.3@29.21,14.953 ; C1.1 33.72,20.663 33.802,20.582 33.802,20.018 33.934,20.151 34.619,20.151 v1(34.638,20.17) 34.657,20.189 34.657,20.594 34.915,20.852 34.915,22.843 34.284,23.475 ; C5.1 42.23,14.769 42.523,14.476 v1(42.55,14.476) ; C10.1 42.244,13.807 42.377,13.939 v1@42.377,14.623
  Top Layer w0.75: J4.3@19.21,14.948 v1@20.407,14.948 ; v1(27.574,12.496) 27.574,12.5 27.625,12.551 v1(27.625,14.948) J3.3@29.205,14.948
  Bottom Layer w0.5: v1(21.146,21.244) 21.146,21.263 24.141,24.258 v1(24.141,24.277) 26.625,24.277 26.707,24.359 ; 26.75,24.402 26.707,24.359 ; v1(32.076,23.611) 32.076,24.186 ; v1(34.638,20.17) 34.638,18.894 34.614,18.87 34.614,18.622 34.577,18.585 34.577,17.839 37.225,15.191 37.225,14.591 37.743,14.072 40.406,14.072 40.81,14.476 v1(42.55,14.476) 43.225,13.801 43.225,8.993 41.75,7.518 MH2.1 ; J2.3 35.677,25.547 34.724,25.547 33.363,24.186 32.076,24.186 ; 26.707,24.359 26.88,24.186 32.076,24.186
  Bottom Layer w0.75: MH1.1 16.928,11.928 27.135,11.928 27.574,12.367 v1(27.574,12.496) ; v1(20.514,14.869) 26.625,14.869 ; 26.625,24.277 26.625,14.869 ; 26.75,24.402 J1.2@26.75,25.45 ; v1(27.625,14.948) 27.546,14.869 26.625,14.869
  other v1: 26.75,28.325
JD_DATA: D3.1 FB1.1 J1.1 MH3.1 | length 24.6
  Top Layer w0.25: J1.1@25.48,25.45 26.375,26.345 27.315,26.345 J1.1@28.02,27.05 ; J1.1@28.02,27.55 J1.1@28.02,28.075
  Top Layer w0.3: J1.1@28.02,27.55 28.02,27.05 28.894,26.176 28.894,23.686 ; D3.1 28.894,23.686 ; FB1.1 33.6,24.15 33.114,24.636 33.114,24.9 ; MH3.1 38.663,26.75 37.763,27.65 36.23,27.65 36.125,27.755 35.433,27.755 34.944,27.266 34.944,27.259 34.274,26.589 34.274,26.339 33.114,25.178 33.114,24.9 ; 28.894,23.686 29.044,23.686 29.676,24.318 32.532,24.318 33.114,24.9
JD_DATA_MCU: D1.3 R1.1 U3.20 | length 9.4
  Top Layer w0.3: R1.1 R1.1@31.52,20.095 ; D1.3 32.185,21.035 31.67,20.52 31.67,20.245 R1.1@31.52,20.095 ; U3.20 36,22.05 36,21.325 36.175,21.15 36.175,20.61 34.915,19.35 32.263,19.35 31.89,19.723 31.89,19.725 R1.1@31.52,20.095
JD_PWR: C2.2 C7.2 D2.1 J1.3 MH4.1 R2.1 U1.1 U1.3 U4.1 | length 38.1
  Top Layer w0.25: 14.971,20.346 14.119,19.494 14.119,18.713 14.452,18.38 14.487,18.38 14.637,18.231 14.637,18.195 14.77,18.061 14.77,17.806 14.917,17.659 15.785,17.659 16.298,17.147 16.325,17.147 16.448,17.024 R2.1@16.448,16.997
  Top Layer w0.5: MH4.1 12.471,26.029 14.271,26.029 15.043,25.257 15.043,25.25 ; U4.1 15.525,20.275 15.043,20.275 14.971,20.346 14.75,20.568 C7.2 14.75,24.957 15.043,25.25 ; U1.1 17.825,26.6 17.825,27.082 17.532,27.375 16.218,27.375 15.925,27.082 U1.3 15.043,25.25 ; U1.1@17.848,25.227 19.907,25.227 21.807,23.327 D2.1@22.636,23.327 ; D2.1@22.836,23.377 23.052,23.593 23.052,24.393 23.083,24.393 23.226,24.537 23.263,24.552 23.288,24.577 23.342,24.577 23.803,25.038 23.803,25.092 23.828,25.117 23.843,25.154 24.205,25.515 ; J1.3@25.48,28.325 25.342,28.187 25.342,26.653 24.205,25.515 ; J1.3@28.02,25.45 28.02,25.405 27.135,24.52 26.365,24.52 26.36,24.525 25.87,24.525 25.865,24.52 24.946,24.52 24.504,24.962 24.504,25.215 24.205,25.515
JD_RGB_B: R4.2 U3.15 | length 18.5
  Top Layer w0.3: R4.2 25.122,20.194 25.757,19.56 26.609,19.56 27.349,18.82 v1(28.143,18.82) ; v1(38.459,20.095) 39.2,20.835 U3.15
  Bottom Layer w0.3: v1(28.143,18.82) 32.971,18.82 34.058,19.906 34.058,20.958 34.589,21.49 35.836,21.49 37.23,20.095 v1(38.459,20.095)
JD_RGB_G: R5.2 U3.16 | length 11.9
  Top Layer w0.3: R5.2 29.121,19.525 29.126,19.52 29.638,19.52 30.668,18.49 35.272,18.49 35.361,18.58 35.644,18.58 37.244,20.18 37.414,20.18 38.5,21.266 38.5,22.05 U3.16
JD_RGB_R: R6.2 U3.17 | length 11.4
  Top Layer w0.3: R6.2 28.999,20.76 29.099,20.66 29.124,20.66 30.259,19.525 31.095,19.525 31.7,18.92 35.093,18.92 35.183,19.01 35.253,19.01 36.847,20.605 37.103,20.605 37.85,21.351 37.85,22.05 U3.17
NetC1_2: C1.2 FB1.2 R1.2 | length 3.2
  Top Layer w0.3: R1.2 32.52,20.095 32.67,20.245 32.67,20.663 C1.2@33.67,21.663 ; C1.2 33.698,21.666 FB1.2@33.698,22.748
NetD4_2: D4.2 R6.1 | length 1.3
  Top Layer w0.3: D4.2 27.5,21.309 27.999,20.81 R6.1
NetD4_3: D4.3 R5.1 | length 3.5
  Top Layer w0.3: D4.3 26,21.125 27.476,19.65 27.926,19.65 28.026,19.55 R5.1
NetD4_4: D4.4 R4.1 | length 2.2
  Top Layer w0.3: R4.1 25.097,22.222 25.85,22.975 D4.4
NetJ3_1: J3.1 R16.2 | length 4.2
  Top Layer w0.3: J3.1@34.29,14.953 34.29,14.152 35.712,12.73 36.88,12.73 R16.2
NetJ3_2: J3.2 Q12.3 | length 20.7
  Top Layer w0.5: Q12.3 14.05,13.214 14.2,13.064 14.25,13.064 14.783,12.53 15.3,12.53 16.367,11.464 19.628,11.464 19.913,11.749 23.587,11.749 23.872,11.464 28.321,11.464 29.437,12.58 29.437,12.703 29.73,12.995 30.593,12.995 31.75,14.153 J3.2@31.75,14.953
NetJ4_1: J4.1 R12.2 | length 15.4
  Top Layer w0.3: J4.1@24.29,14.948 26.129,14.948 26.305,14.772 v1(26.305,12.995) ; v1(30.057,12.3) 35.97,12.3 36.959,11.311 R12.2
  Bottom Layer w0.3: v1(26.305,12.995) 27.15,12.995 27.337,13.182 28.091,13.182 28.973,12.3 v1(30.057,12.3)
NetJ4_2: J4.2 Q10.3 | length 10
  Top Layer w0.5: Q10.3 14.05,14.608 14.795,14.608 16.758,12.645 20.247,12.645 21.75,14.148 J4.2@21.75,14.948
NetR18_2: R18.2 R19.2 U4.5 | length 3.9
  Top Layer w0.3: U4.5 19.3,19.225 20.225,20.15 R18.2 21.583,20.15 21.585,20.151 R19.2@21.625,20.111
nRESET: J2.5 U3.6 | length 13.6
  Top Layer w0.3: v1(35.595,20.91) 35.538,20.967 35.538,21.241 35.47,21.309 35.47,23.038 34.746,23.762 34.746,25.887 J2.5 ; v1(37.009,18.187) 37.984,18.187 39.15,17.021 39.15,16.4 U3.6
  Bottom Layer w0.3: v1(35.595,20.91) 35.538,20.852 35.538,20.161 35.396,20.018 35.882,19.532 35.882,19.313 v1(37.009,18.187)
SERVO0_PWM: U3.13 U10.1 | length 13.5
  Top Layer w0.3: U3.13 40.5,20.807 43.56,17.747 43.56,12.51 42.35,11.3 U10.1
SERVO0_PWM_5V: R12.1 U10.6 | length 1.4
  Top Layer w0.3: R12.1 37.99,11.305 39.345,11.305 U10.6
SERVO1_PWM: U3.14 U10.3 | length 12.1
  Top Layer w0.3: U3.14 39.85,20.849 43.125,17.574 43.125,14.721 43.13,14.716 43.13,14.236 43.125,14.231 43.125,13.375 42.35,12.6 U10.3
SERVO1_PWM_5V: R16.1 U10.4 | length 1.3
  Top Layer w0.3: R16.1 U10.4
SERVO_HI_PWR: R19.1 U3.7 | length 20
  Top Layer w0.3: R19.1 22.525,20.125 23.756,18.894 26.546,18.894 26.75,18.69 26.757,18.69 27.387,18.06 35.45,18.06 35.487,18.097 35.769,18.097 36.523,18.851 38.101,18.851 39.8,17.152 39.8,16.4 U3.7
SERVO_PWR: D5.1 Q10.2 Q12.2 R10.2 R14.2 | length 10.9
  Top Layer w0.5: R14.2 12.732,17.85 ; 12.319,17.638 12.487,17.47 12.487,17.192 12.654,17.025 12.775,17.025 13.1,16.7 13.1,12.726 14.363,11.464 14.85,11.464 15,11.314 Q12.2 ; D5.1@12.57,19.47 12.532,19.432 12.532,18.05 12.732,17.85 ; R10.2 12.732,17.85
SWCLK: J2.4 U3.19 | length 4
  Top Layer w0.3: U3.19 36.6,22.575 36.77,22.745 36.77,23.661 36.621,23.81 36.621,24.815 J2.4
SWDIO: J2.2 U3.18 | length 2.6
  Top Layer w0.3: U3.18 37.284,22.134 37.284,23.239 37.706,23.661 37.611,23.756 37.611,24.225 J2.2
V_LIM: C8.2 C10.2 D5.2 U4.6 U10.5 | length 45.3
  Top Layer w0.35: C8.2@18.014,21.539 C8.2 ; U10.5 39.375,11.975 39.806,11.975 40.105,12.274 40.105,13.015 40.747,13.657 40.761,13.657
  Top Layer w0.5: D5.2@12.57,22.335 13.719,22.335 13.831,22.222 v1(13.858,22.222) ; C8.2@18.025,21.539 18.025,21.525 18.367,21.183 18.765,21.183 v1(19.04,20.908) 19.021,20.889 18.939,20.889 18.325,20.275 18.225,20.275 U4.6 ; v1(36.361,13.885) 36.378,13.901 37.559,13.901 37.678,13.782 40.761,13.782 C10.2
  Bottom Layer w0.5: v1(13.858,22.222) 13.877,22.203 13.877,21.426 14.39,20.914 19.034,20.914 v1(19.04,20.908) ; 14.384,20.92 14.384,20.908 14.097,20.621 14.097,16.652 16.847,13.901 36.344,13.901 v1(36.361,13.885)
pads on no net: J1. J3.5 J3.6 J4.5 J4.6 U1.4 U3.2 U3.8 U3.10 U3.11 U3.12

## Keep-outs
Keep-Out Layer:
  region: 44.25,29.25 42.25,29.25 42.25,4.25 44.25,4.25
  rectangle: 9.25,4.25 11.25,29.25

## Other copper
Top Layer:
  region net GND: 9.55,8.965 9.55,6.65 11.65,4.55 13.965,4.55 13.965,6.735 11.735,8.965
  text "Top Layer" at 44.001,48.25 h1.7
Bottom Layer:
  text "Bottom Layer" at 44,46.75 h1.7

## Silkscreen, mask and mechanical layers (free items; w line width, h text height)
Top Overlay:
  text "Top Overlay" at 44.001,39.95 h1.7
  text "0" at 20.948,17.25 h1.2
  text "SERVO" at 24.342,17.25 h1.2
  text "1" at 31.97,17.25 h1.2
  text "blk/brn" at 17.775,8.7 h0.9 r270
  text "red" at 22.225,8.7 h0.9 r270
  text "yel/ora" at 24.8,8.7 h0.9 r270
  text "white/" at 25.875,8.7 h0.9 r270
  text "blk/brn" at 27.721,8.7 h0.9 r270
  text "red" at 32.171,8.7 h0.9 r270
  text "yel/ora" at 34.746,8.7 h0.9 r270
  text "white/" at 35.822,8.7 h0.9 r270
Bottom Overlay:
  region: 31.7,5.275 31.7,6.85 30.195,6.85 30.195,5.275
  region: 28.9,4.75 28.9,9.249 16.45,9.249 16.45,4.75
  region: 39.784,9.584 40.437,9.908 40.362,9.27
  region: 40.911,9.187 40.4,8.904 40.275,9.283
  region: 38.916,8.716 38.592,8.063 39.23,8.138
  region: 39.313,7.589 39.596,8.1 39.217,8.225
  region: 39.784,23.916 40.437,23.592 40.362,24.23
  region: 40.911,24.313 40.4,24.596 40.275,24.217
  region: 38.916,24.784 38.592,25.437 39.23,25.362
  region: 39.313,25.911 39.596,25.4 39.217,25.275
  region: 14.584,8.716 14.908,8.063 14.27,8.138
  region: 14.187,7.589 13.904,8.1 14.283,8.225
  region: 13.716,9.584 13.063,9.908 13.138,9.27
  region: 12.589,9.187 13.1,8.904 13.225,9.283
  region: 14.584,24.784 14.908,25.437 14.27,25.362
  region: 12.589,24.313 13.1,24.596 13.225,24.217
  region: 13.716,23.916 13.063,23.592 13.138,24.23
  region: 14.187,25.911 13.904,25.4 14.283,25.275